# EAGLE board pc_rpi_healthypi (EAGLE 6.4)
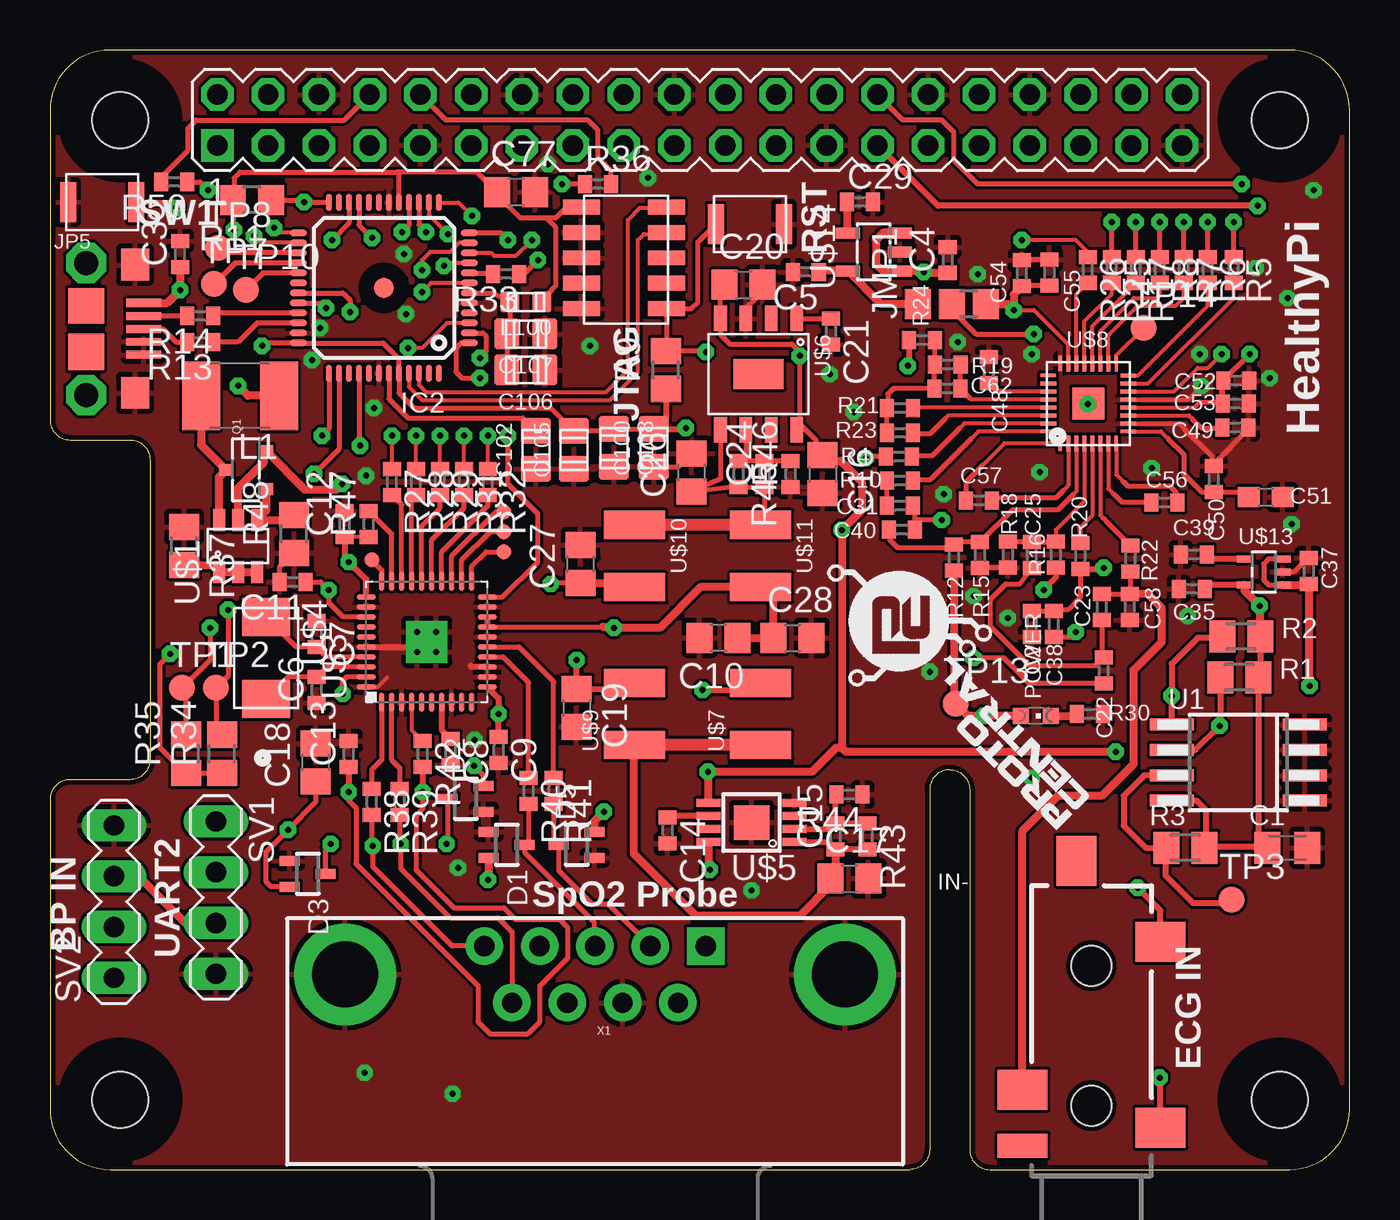
[diagram p0: board, top side]
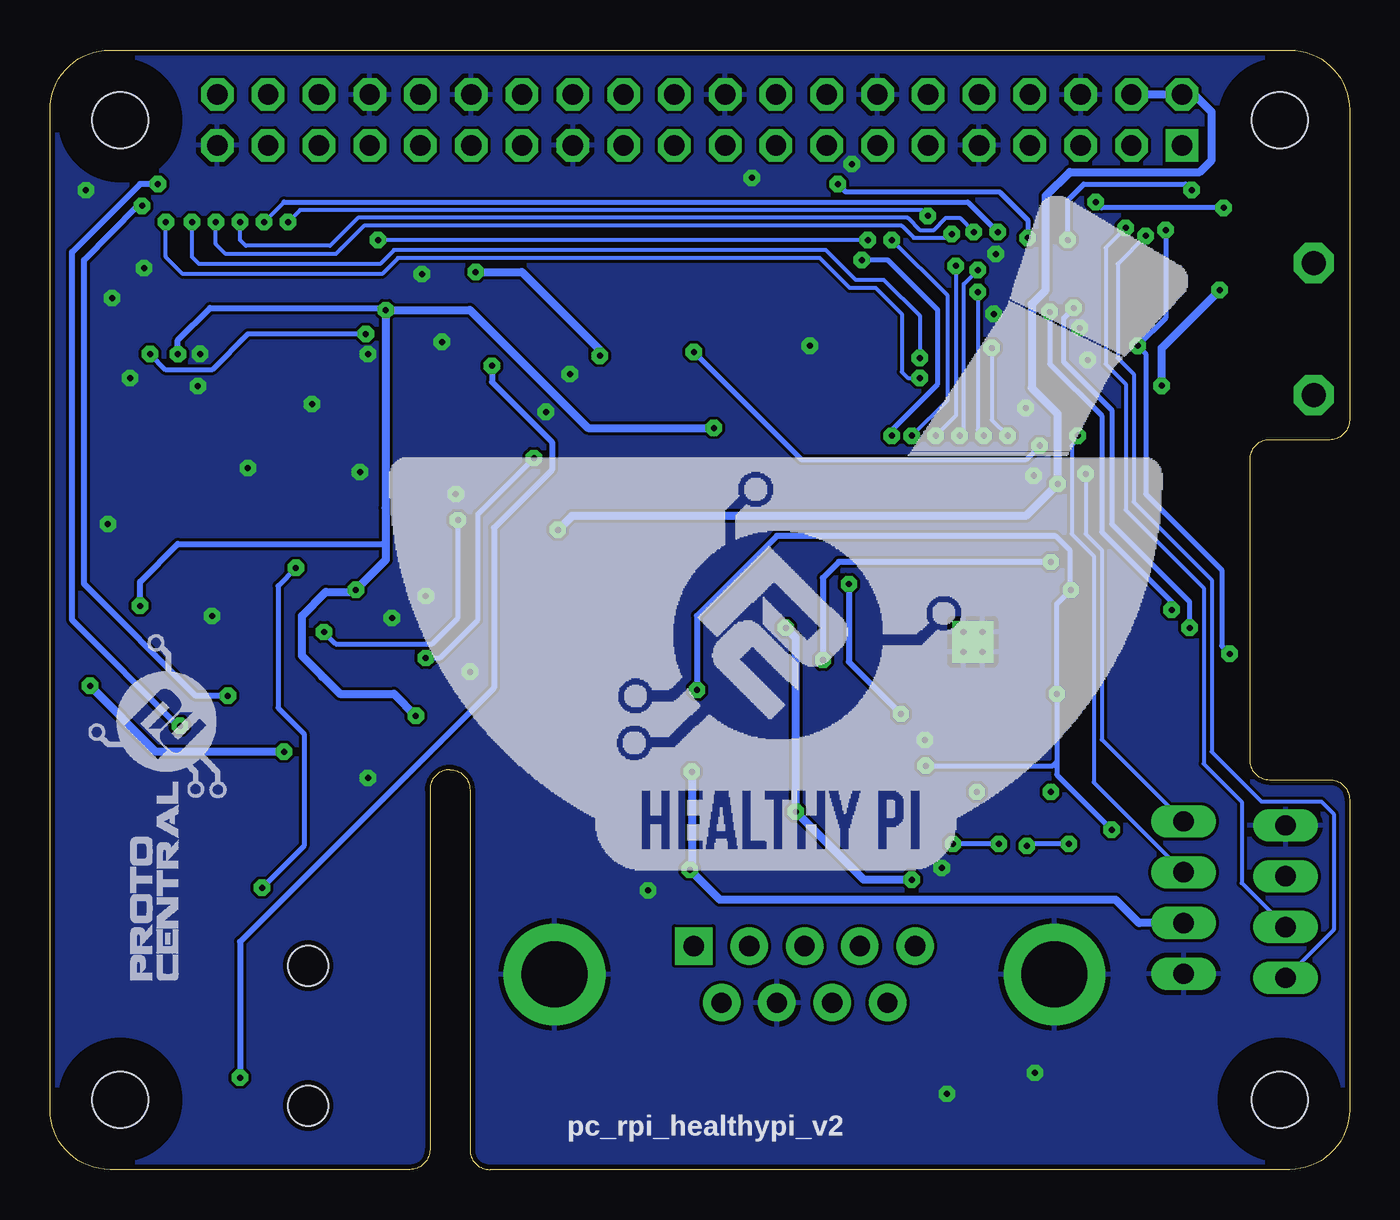
[diagram p1: board, bottom side, seen from below]

Size 65 x 56 mm. Coordinates in mm from the lower left corner, seen from the top.
Outline: 0,3 arc90 3,0 43,0 arc90 44,1 44,19 arc-90 45,20 arc-90 46,19 46,1 arc90 47,0 62,0 arc90 65,3 65,53 arc90 62,56 3,56 arc90 0,53 0,37.5 arc90 1,36.5 4,36.5 arc-90 5,35.5 5,20.5 arc-90 4,19.5 1,19.5 arc90 0,18.5 0,3
Copper layers (1*2*15*16): Top 0.035mm / dielectric 1.5mm / Route2 0.035mm / dielectric 0.15mm / Route15 0.035mm / dielectric 0.2mm / Bottom 0.035mm
Design rules "Circuitects-Rules": minimum track width 6mil, minimum drill 0.3mm, track to track 6mil, track to pad 6mil, pad to pad 6mil, via to via 6mil, smd to smd 6mil, copper to edge 10mil, drill to drill 8mil, minimum pad ring 12mil, minimum via ring 10mil, stop-mask expansion 4mil, vias tented up to drill 25mil, thermal gap 10mil
Net classes: 2 gnd: width 0.102 mm, drill 0.1 mm; 4 USBpair: width 0.102 mm, drill 0.1 mm, clearance 0.15 mm to class 3
Holes 2.8 mm at 3.5,3.5 3.5,52.5 61.5,52.5 61.5,3.5
tRestrict: area 1.9,51 to 5,54; area 60,51 to 63,54; area 60,1.9 to 63,5; area 1.9,1.9 to 5,5
bRestrict: area 1.9,1.9 to 5,5; area 1.9,51 to 5,54; area 60,1.9 to 63,5; area 60,51 to 63,54

## Footprints (pad centres in the part's own frame; a part is rotated, then mirrored left to right if it is on the bottom)
C0805K = smd 1.3 x 1.6: 1 -1,0; 2 1,0
C0402 = smd 0.7 x 0.9: 1 -0.65,0; 2 0.65,0
C0805 = smd 1.3 x 1.5: 1 -0.95,0; 2 0.95,0
C0603 = smd 1.1 x 1: 1 -0.85,0; 2 0.85,0
C0805' = smd 1.5 x 1.25: 1 0,0.95; 2 0,-0.95
HDR-SMT-50MIL/5X2 = smd 0.74 x 1.85: 1 -2.54,-2.125; 2 -2.54,2.125; 3 -1.27,-2.125; 4 -1.27,2.125; 5 0,-2.125; 6 0,2.125; 7 1.27,-2.125; 8 1.27,2.125; 9 2.54,-2.125; 10 2.54,2.125
SOT323 = smd 0.5 x 1: 1 0,0.9; 2 -0.65,-0.9; 3 0.65,-0.9
TQFP48 = smd 0.85 x 0.32: 1 -4.275,2.75; 2 -4.275,2.25; 3 -4.275,1.75; 4 -4.275,1.25; 5 -4.275,0.75; 6 -4.275,0.25; 7 -4.275,-0.25; 8 -4.275,-0.75; 9 -4.275,-1.25; 10 -4.275,-1.75; 11 -4.275,-2.25; 12 -4.275,-2.75; 25 4.275,-2.75; 26 4.275,-2.25; 27 4.275,-1.75; 28 4.275,-1.25; 29 4.275,-0.75; 30 4.275,-0.25; 31 4.275,0.25; 32 4.275,0.75; 33 4.275,1.25; 34 4.275,1.75; 35 4.275,2.25; 36 4.275,2.75 | smd 0.32 x 0.85: 13 -2.75,-4.275; 14 -2.25,-4.275; 15 -1.75,-4.275; 16 -1.25,-4.275; 17 -0.75,-4.275; 18 -0.25,-4.275; 19 0.25,-4.275; 20 0.75,-4.275; 21 1.25,-4.275; 22 1.75,-4.275; 23 2.25,-4.275; 24 2.75,-4.275; 37 2.75,4.275; 38 2.25,4.275; 39 1.75,4.275; 40 1.25,4.275; 41 0.75,4.275; 42 0.25,4.275; 43 -0.25,4.275; 44 -0.75,4.275; 45 -1.25,4.275; 46 -1.75,4.275; 47 -2.25,4.275; 48 -2.75,4.275 | smd 1 x 1: P$1 0,0
B0R-JMP = smd 1.5 x 1.3: 1 0,1.7; 2 0,0; 3 0,-1.7
AUDIO-JACK-3.5MM-SMD = smd 2 x 2.5: RING 4.3,3.45; SLEEVE 2.4,-3.45; TIP 11.7,-3.45 | smd 1.2 x 2.5: RSH 1.5,3.45 | smd 2.5 x 2: TSH 15.75,0.75 | hole 2: 3.5,0; 10.5,0
MICRO-B = smd 0.4 x 1.75: 1 -1.25,2.975; 2 -0.6,2.975; 3 0.05,2.975; 4 0.7,2.975; 5 1.35,2.975 | smd 1.8 x 1.8: P$1 -1.1,0.1; P$2 1.2,0.1 | drill 1.2 pad 2 octagon: P$3 -3.25,0.1; P$4 3.35,0.1 | smd 1.6 x 1.4: P$5 -3.15,2.55; P$6 3.25,2.55
PIN_20X2 = drill 1.016 square: 1 -24.13,-1.27 | drill 1.016 octagon: 2 -24.13,1.27; 3 -21.59,-1.27; 4 -21.59,1.27; 5 -19.05,-1.27; 6 -19.05,1.27; 7 -16.51,-1.27; 8 -16.51,1.27; 9 -13.97,-1.27; 10 -13.97,1.27; 11 -11.43,-1.27; 12 -11.43,1.27; 13 -8.89,-1.27; 14 -8.89,1.27; 15 -6.35,-1.27; 16 -6.35,1.27; 17 -3.81,-1.27; 18 -3.81,1.27; 19 -1.27,-1.27; 20 -1.27,1.27; 21 1.27,-1.27; 22 1.27,1.27; 23 3.81,-1.27; 24 3.81,1.27; 25 6.35,-1.27; 26 6.35,1.27; 27 8.89,-1.27; 28 8.89,1.27; 29 11.43,-1.27; 30 11.43,1.27; 31 13.97,-1.27; 32 13.97,1.27; 33 16.51,-1.27; 34 16.51,1.27; 35 19.05,-1.27; 36 19.05,1.27; 37 21.59,-1.27; 38 21.59,1.27; 39 24.13,-1.27; 40 24.13,1.27
L1812 = smd 1.9 x 3.4: 1 -1.95,0; 2 1.95,0
C0603' = smd 1 x 0.95: 1 0,0.8; 2 0,-0.8
CHIPLED_0603 = smd 0.8 x 0.8: A 0,-0.75; C 0,0.75
SOT23-R = smd 0.6 x 0.7: 1 -0.95,-1; 2 0.95,-1; 3 0,1
M0805 = smd 1.3 x 1.6: 1 -0.95,0; 2 0.95,0
R0402 = smd 0.7 x 0.9: 1 -0.65,0; 2 0.65,0
R0805 = smd 1.3 x 1.5: 1 -0.95,0; 2 0.95,0
MA04-1 = drill 1.016 long: 1 -3.81,0; 2 -1.27,0; 3 1.27,0; 4 3.81,0
B1,27 = smd 1.27 x 1.27: TP 0,0
PAD.03X.03 = smd 0.762 x 0.762: P$1 0,0
SOIC8 = smd 0.6 x 2.2: 1 -1.905,-3.33; 2 -0.635,-3.33; 3 0.635,-3.33; 4 1.905,-3.33; 5 1.905,3.33; 6 0.635,3.33; 7 -0.635,3.33; 8 -1.905,3.33
SOT26 = smd 0.6 x 1.1: 1 -0.95,-1.3; 2 0,-1.3; 3 0.95,-1.3; 4 0.95,1.3; 5 0,1.3; 6 -0.95,1.3
QFN-40 = smd 0.95 x 0.28: 1 -3.025,2.25; 2 -3.025,1.75; 3 -3.025,1.25; 4 -3.025,0.75; 5 -3.025,0.25; 6 -3.025,-0.25; 7 -3.025,-0.75; 8 -3.025,-1.25; 9 -3.025,-1.75; 10 -3.025,-2.25; 21 3.025,-2.25; 22 3.025,-1.75; 23 3.025,-1.25; 24 3.025,-0.75; 25 3.025,-0.25; 26 3.025,0.25; 27 3.025,0.75; 28 3.025,1.25; 29 3.025,1.75; 30 3.025,2.25 | smd 0.28 x 0.95: 11 -2.25,-3.025; 12 -1.75,-3.025; 13 -1.25,-3.025; 14 -0.75,-3.025; 15 -0.25,-3.025; 16 0.25,-3.025; 17 0.75,-3.025; 18 1.25,-3.025; 19 1.75,-3.025; 20 2.25,-3.025; 31 2.25,3.025; 32 1.75,3.025; 33 1.25,3.025; 34 0.75,3.025; 35 0.25,3.025; 36 -0.25,3.025; 37 -0.75,3.025; 38 -1.25,3.025; 39 -1.75,3.025; 40 -2.25,3.025 | drill 0.3 pad 1.1 square: EXP@6 -0.5,0.475; EXP@7 0.5,0.475; EXP@10 -0.5,-0.475; EXP@11 0.5,-0.475
ABM3 = smd 1.9 x 2.4: 1 -2.05,0; 2 2.05,0
S-PDSO-G08 = smd 0.4 x 1.2: 1 -0.975,-2.157; 2 -0.325,-2.157; 3 0.325,-2.157; 4 0.975,-2.157; 5 0.975,2.157; 6 0.325,2.157; 7 -0.325,2.157; 8 -0.975,2.157 | smd 1.73 x 1.78: TH 0,0
DDA = smd 0.635 x 1.27: 1 -1.905,-2.78; 2 -0.635,-2.78; 3 0.635,-2.78; 4 1.905,-2.78; 5 1.905,2.78; 6 0.635,2.78; 7 -0.636,2.78; 8 -1.905,2.78 | smd 2.5 x 1.5: 9 0,0
LPS = smd 1.4 x 3.05: 1 -1.56,0; 2 1.56,0
S-PVQFN-N32 = smd 0.8 x 0.2: 1 -2,1.4; 2 -2,1; 3 -2,0.6; 4 -2,0.2; 5 -2,-0.2; 6 -2,-0.6; 7 -2,-1; 8 -2,-1.4; 17 2,-1.4; 18 2,-1; 19 2,-0.6; 20 2,-0.2; 21 2,0.2; 22 2,0.6; 23 2,1; 24 2,1.4 | smd 0.2 x 0.8: 9 -1.4,-2; 10 -1,-2; 11 -0.6,-2; 12 -0.2,-2; 13 0.2,-2; 14 0.6,-2; 15 1,-2; 16 1.4,-2; 25 1.4,2; 26 1,2; 27 0.6,2; 28 0.2,2; 29 -0.2,2; 30 -0.6,2; 31 -1,2; 32 -1.4,2 | smd 1.6 x 1.6: P$33 0,0
SC70-5 = smd 0.35 x 0.8: 1 -0.65,-0.95; 2 0,-0.95; 3 0.65,-0.95; 4 0.65,0.95; 5 -0.65,0.95
SOT23-DBV = smd 0.55 x 1.2: 1 -0.95,-1.3; 2 0,-1.3; 3 0.95,-1.3; 4 0.95,1.3; 5 -0.95,1.3
B3U-1000P = smd 0.8 x 2: P$1 -1.7,0; P$2 1.7,0
DB9 = drill 1.016 pad 1.88 square: 1 -5.54,-1.42 | drill 1.016 pad 1.88: 2 -2.77,-1.42; 3 0,-1.42; 4 2.77,-1.42; 5 5.54,-1.42; 6 -4.15,1.42; 7 -1.38,1.42; 8 1.38,1.42; 9 4.15,1.42 | drill 3.302 pad 5.08: G1 -12.5,0; G2 12.5,0

## Placement (x,y rotation side)
C1  100nF  [C0805K]  61.88,16.1 0 top
C2  [C0402]  49.1,27.29 270 top
C3  100nf  [C0402]  6.5,45.8 90 top
C4  1u  [C0402]  44.9,45.5 90 top
C5  1u  [C0402]  37.8,44.9 180 top
C6  22p  [C0402]  13.34,23.99 90 top
C7  22p  [C0402]  13.34,26.79 270 top
C8  2.2u  [C0402]  20.04,20.89 270 top
C9  0.1u  [C0402]  22.44,20.99 270 top
C10  1u  [C0805]  33.44,26.59 180 top
C11  0.1u  [C0402]  12.14,29.39 180 top
C12  0.1u  [C0402]  14.74,32.29 90 top
C13  2.2u  [C0402]  14.94,20.79 90 top
C14  100nF  [C0402]  30.89,16.96 270 top
C15  100nF  [C0402]  39.29,16.66 90 top
C16  10uF  [C0805]  38.64,34.79 270 top
C17  10uF  [C0805]  39.99,14.56 0 top
C18  10uF  [C0805]  13.29,20.36 90 top
C19  10uF  [C0805]  26.34,23.09 270 top
C20  10uF  [C0805]  34.69,44.26 0 top
C21  100nF  [C0402]  39.06,41.91 270 top
C22  2.2n  [C0402]  52.7,24.96 270 top
C23  100n  [C0402]  52.6,28.13 270 top
C24  1000pF  [C0402]  35.74,34.79 90 top
C25  2.2n  [C0402]  49.1,30.74 90 top
C26  10uF  [C0805]  32.09,34.86 90 top
C27  10uF  [C0805]  26.54,30.29 90 top
C28  10uF  [C0805]  37.14,26.59 0 top
C29  1u  [C0402]  40.5,48.4 0 top
C31  2.2n  [C0402]  42.52,33.21 180 top
C35  1u  [C0402]  57.1,29.05 0 top
C37  1u  [C0402]  62.96,29.93 270 top
C38  100n  [C0402]  50.2,27.28 270 top
C39  10n  [C0402]  57.2,30.77 0 top
C40  2.2n  [C0402]  42.6,32.01 180 top
C48  1u, NP0/C0G  [C0402]  46.96,39.98 270 top
C49  1u, NP0/C0G  [C0402]  59.28,37.12 180 top
C50  100n  [C0402]  58.2,34.53 270 top
C51  10u  [C0603]  60.81,33.63 0 top
C52  100n  [C0402]  59.33,39.47 180 top
C53  1u  [C0402]  59.3,38.31 180 top
C54  100n  [C0402]  48.6,44.83 270 top
C55  1u  [C0402]  49.98,44.87 270 top
C56  47n  [C0402]  55.74,33.37 0 top
C57  47n  [C0402]  46.46,33.47 0 top
C58  DNP  [C0402]  54,28.15 90 top
C62  47p  [C0402]  44.88,39.07 0 top
C77  100n  [C0805]  23.3,48.9 0 top
C100  100nF  [C0805']  30.2,36.1 0 top
C102  100nF  [C0805']  24.3,36 0 top
C105  100nF  [C0805']  26.2,36 0 top
C106  100nF  [C0805']  23.8,40 90 top
C107  10uF  [C0805']  23.8,41.8 90 top
C108  100nF  [C0805']  28.2,36.1 180 top
CON_JTAG1  HDR-SMT-50MIL/5X2  [HDR-SMT-50MIL/5X2]  28.7,45.6 270 top
D1  [SOT323]  22.84,16.24 270 top
D2  [SOT323]  20.79,18.54 90 top
D3  [SOT323]  12.89,14.79 270 top
D5  [SOT323]  26.34,16.24 90 top
IC2  SAMD21G18A-AUT  [TQFP48]  16.7,44.1 180 top
JMP1  0R-JUMPB  [B0R-JMP]  45.1,43.3 90 top
JP3  [AUDIO-JACK-3.5MM-SMD]  52.09,-0.3 90 top
JP5  MICRO-B  [MICRO-B]  1.7,42.1 270 top
K1  PIN20X2  [PIN_20X2]  32.5,52.5 0 top
L1  MF-MSMF050-2  [L1812]  9.5,38.7 180 top
L100  BLM18PG471SN1  [C0603']  23.8,43.4 90 top
POWER  Red  [CHIPLED_0603]  49.31,22.7 270 top
Q1  SI2323DS-TI-GE3  [SOT23-R]  9.8,35 90 top
R1  3k9  [M0805]  59.48,24.62 0 top
R2  3k9  [M0805]  59.58,26.66 0 top
R3  1k  [M0805]  56.8,16.1 0 top
R4  40.2k  [R0402]  42.47,35.66 0 top
R5  0R  [R0402]  59.2,45 270 top
R6  0R  [R0402]  57.9,45 270 top
R7  0R  [R0402]  56.7,45 270 top
R8  0R  [R0402]  55.5,45 270 top
R9  10K  [R0805]  30.8,40 90 top
R10  40.2k  [R0402]  42.52,34.46 0 top
R11  100K  [R0805]  10.1,48.5 180 top
R12  10M  [R0402]  45.22,30.61 90 top
R13  0R  [R0402]  7.5,41.4 180 top
R14  0R  [R0402]  7.5,42.7 180 top
R15  10M  [R0402]  46.52,30.73 90 top
R16  10M  [R0402]  50.31,30.76 90 top
R17  0R  [R0402]  54.3,45 270 top
R18  10M  [R0402]  47.92,30.77 90 top
R19  1M  [R0402]  44.9,40.27 0 top
R20  0R  [R0402]  51.53,30.7 90 top
R21  100K  [R0402]  42.51,38.09 0 top
R22  0R  [R0402]  54.04,30.57 90 top
R23  0R  [R0402]  42.5,36.85 0 top
R24  100k  [R0402]  43.61,41.49 0 top
R25  0R  [R0402]  53.1,45 270 top
R26  0R  [R0402]  51.9,45 270 top
R27  0R  [R0402]  17.1,34.4 270 top
R28  0R  [R0402]  18.3,34.4 270 top
R29  0R  [R0402]  19.5,34.4 270 top
R30  330R  [R0402]  52,22.79 180 top
R31  0R  [R0402]  20.7,34.4 270 top
R32  0R  [R0402]  21.9,34.4 270 top
R33  0R  [R0402]  22.8,44.8 180 top
R34  10K  [R0805]  8.6,20.8 90 top
R35  10K  [R0805]  6.8,20.8 90 top
R36  100K  [R0402]  27.4,49.3 0 top
R37  10K  [R0805]  6.7,31.2 270 top
R38  0R  [R0402]  16.09,18.39 270 top
R39  0R  [R0402]  17.49,18.39 270 top
R40  0R  [R0402]  23.94,18.94 270 top
R41  0R  [R0402]  25.19,18.94 270 top
R42  0R  [R0402]  18.64,20.79 270 top
R43  75K  [R0402]  40.89,16.66 270 top
R44  47K  [R0402]  39.99,18.76 180 top
R45  4.02k  [R0402]  34.44,34.79 270 top
R46  1k  [R0402]  37.04,34.79 90 top
R47  10K  [R0402]  15.94,32.29 90 top
R48  47K  [R0805]  12.2,31.8 90 top
R50  100K  [R0402]  6.2,49.4 180 top
SV1  [MA04-1]  8.3,13.6 270 top
SV2  [MA04-1]  3.2,13.4 90 top
TP1  TPSQB1,27  [B1,27]  6.6,24.1 0 top
TP2  TPSQB1,27  [B1,27]  8.3,24.1 0 top
TP3  TPSQB1,27  [B1,27]  59.1,13.5 0 top
TP4  TEST-POINT3  [PAD.03X.03]  16.09,30.49 90 top
TP7  TPSQB1,27  [B1,27]  8.2,44.3 0 top
TP8  TPSQB1,27  [B1,27]  8.4,46.1 0 top
TP9  TEST-POINT3  [PAD.03X.03]  22.7,32.9 0 top
TP10  TPSQB1,27  [B1,27]  9.8,44 0 top
TP11  TEST-POINT3  [PAD.03X.03]  22.7,31.9 0 top
TP12  TEST-POINT3  [PAD.03X.03]  22.7,30.9 0 top
TP13  TPSQB1,27  [B1,27]  45.3,23.3 0 top
TP14  TPSQB1,27  [B1,27]  54.7,42.1 0 top
U1  EEPROM24  [SOIC8]  59.44,20.36 90 top
U$1  DMMT5401  [SOT26]  9.4,31.2 0 top
U$2  [PROTY_WITH_TEXT]  56.14,8.36 90 bottom
U$3  AFE4400  [QFN-40]  18.84,26.39 90 top
U$4  ABM3  [ABM3]  10.8,25.6 270 top
U$5  TPS7A4901  [S-PDSO-G08]  35.09,17.36 90 top
U$6  LP3878  [DDA]  35.44,39.79 180 top
U$7  LPS  [LPS]  35.54,22.79 90 top
U$8  [S-PVQFN-N32]  51.93,38.32 90 top
U$9  LPS  [LPS]  29.24,22.79 90 top
U$10  LPS  [LPS]  29.24,30.69 270 top
U$11  LPS  [LPS]  35.54,30.69 270 top
U$12  [PROTY_WITH_TEXT]  54.54,19.64 135 top
U$13  TPS717XX  [SC70-5]  60.71,29.89 90 top
U$14  TPS730XX  [SOT23-DBV]  41.2,45.9 90 top
U$15  HEALTHYPI  [HEALTHYPI]  48,15 0 bottom
U$17  B3U-1000P  [B3U-1000P]  2.6,48.4 0 top
U$18  B3U-1000P  [B3U-1000P]  35,47.3 0 top
X1  [DB9]  27.26,9.76 180 top

## Library data of the parts
C1 = resistor; DIELECTRIC: X7R
C2-C29 C31 C35 C37-C40 C48-C50 C52-C58 C62 C77 L1 R4-R48 R50 = rcl
C51 = resistor
C100 C102 C105-C108 IC2 L100 = Arduino
CON_JTAG1 JP5 U$1-U$15 U$17 U$18 X1 = circuitects
D1-D3 D5 = zetex; OC_FARNELL: unknown; OC_NEWARK: unknown
JMP1 = jump-0r-smd
JP3 = SparkFun-Connectors; PROD_ID: CONN-10353
K1 U1 = FLYFISH
POWER = led
Q1 = microbuilder
R1-R3 = resistor; TOLERANCE: 5%
SV1 SV2 = con-lstb; OC_FARNELL: unknown; OC_NEWARK: unknown
TP1-TP3 TP7 TP8 TP10 TP13 TP14 = testpad
TP4 TP9 TP11 TP12 = SparkFun

## Nets
!ADC_RESET: R47.2 U$3.29
+3V3: C1.1 C35.2 C54.2 C55.2 C77.1 C100.1 C105.1 C108.2 CON_JTAG1.1 IC2.17 IC2.36 IC2.44 JMP1.3 L100.2 POWER.A R1.2 R2.2 R3.2 R9.1 R11.2 R12.1 R16.1 R34.1 R35.1 TP13.TP U1.8 U$8.14 U$8.23 U$13.5
+5V: C4.1 C16.1 C20.1 C37.2 K1.2 K1.4 Q1.2 SV1.3 SV2.3 U$1.5 U$5.5 U$5.8 U$6.4 U$6.8 U$13.1 U$13.3 U$14.1 U$14.3
BP_RX: IC2.37 SV1.2
BP_TX: IC2.38 SV1.1
CLK: TP14.TP U$8.17
DIAG_END: TP12.P$1 U$3.21
ECG_!DRDY: IC2.10 R26.1
ECG_CS: IC2.14 R7.1
ECG_MISO: IC2.13 R25.1
ECG_MOSI: IC2.15 R8.1
ECG_PWDN: IC2.1 R5.1
ECG_SCK: IC2.16 R17.1
ECG_START: IC2.2 R6.1
GLUCO_RX: IC2.25 SV2.2
GLUCO_TX: IC2.26 SV2.1
GND: C1.2 C2.2 C3.2 C4.2 C5.2 C6.1 C7.1 C8.2 C9.2 C10.2 C11.2 C12.2 C13.2 C14.2 C16.2 C17.2 C18.2 C19.2 C20.2 C21.2 C26.2 C27.2 C28.2 C29.2 C35.1 C37.1 C39.1 C48.1 C49.1 C50.1 C51.2 C52.1 C53.1 C54.1 C55.1 C58.1 C77.2 C100.2 C102.2 C105.2 C106.2 C107.2 C108.1 CON_JTAG1.3 CON_JTAG1.5 CON_JTAG1.9 D1.2 D2.2 D3.2 D5.2 IC2.5 IC2.18 IC2.35 IC2.42 JP5.4 JP5.5 JP5.P$5 JP5.P$6 K1.6 K1.9 K1.14 K1.20 K1.25 K1.30 K1.34 K1.39 R15.1 R18.1 R30.1 R37.1 R44.1 R46.1 R48.1 SV1.4 SV2.4 U1.1 U1.2 U1.3 U1.4 U$3.3 U$3.8 U$3.12 U$3.13 U$3.16 U$3.19 U$3.32 U$3.36 U$3.40 U$3.EXP@6 U$3.EXP@7 U$3.EXP@10 U$3.EXP@11 U$5.4 U$5.TH U$6.3 U$8.10 U$8.13 U$8.24 U$13.2 U$14.2 U$17.P$1 U$18.P$2 X1.7 X1.G1 X1.G2
INN: D3.1 R38.2 X1.5
INP: D2.1 R39.2 X1.9
LED_ALM: TP11.P$1 U$3.22
LED_DRV_SUP: C10.1 C28.1 D1.3 D5.3 U$3.17 U$3.18 U$11.2
N$1: K1.28 R1.1 U1.6
N$2: K1.27 R2.1 U1.5
N$3: R3.1 TP3.TP U1.7
N$4: C39.2 U$13.4
N$5: C52.2 C53.2 JMP1.2 U$8.12
N$6: C106.1 C107.1 IC2.6 L100.1
N$7: POWER.C R30.2
N$8: R4.2 U$8.31
N$9: C6.2 U$3.38 U$4.2
N$10: C22.2 R4.1
N$11: C22.1 C23.2 C25.1
N$12: R22.2 U$8.6
N$13: C7.2 U$3.37 U$4.1
N$14: R20.2 U$8.5
N$15: C8.1 U$3.7
N$16: TP4.P$1 U$3.30
N$17: R38.1 U$3.1
N$18: R39.1 U$3.2
N$19: C48.2 U$8.27
N$20: R40.1 U$3.14
N$21: R41.1 U$3.15
N$23: C13.1 R42.2
N$25: C14.1 U$5.6
N$26: R10.2 U$8.32
N$27: C15.1 C17.1 R43.2 U$5.1 U$7.1 U$9.1
N$28: C31.2 R10.1
N$29: C31.1 C38.2 C40.1
N$30: C2.1 C38.1 JP3.TIP R20.1
N$31: C40.2 R12.2 R15.2 U$8.3
N$32: C25.2 R16.2 R18.2 U$8.4
N$33: R21.2 U$8.29
N$34: C62.2 R19.2 U$8.28
N$35: C62.1 R19.1 R21.1 R23.1 R24.2
N$36: C49.2 U$8.11
N$37: C56.2 U$8.8
N$38: C56.1 U$8.7
N$39: C15.2 R43.1 R44.2 U$5.2
N$40: C50.2 C51.1 U$8.9
N$41: C57.2 U$8.2
N$42: C21.1 U$6.1
N$43: C57.1 U$8.1
N$44: C24.1 C26.1 R45.2 U$6.5 U$10.1 U$11.1
N$45: C23.1 C58.2 JP3.RING R22.1
N$46: C24.2 R45.1 R46.2 U$6.6
N$50: R23.2 U$8.30
N$51: JP3.SLEEVE R24.1
N$52: R5.2 U$8.15
N$53: IC2.21 R36.1
N$54: IC2.22 R50.1
N$55: R6.2 U$8.16
N$56: R7.2 U$8.18
N$57: IC2.24 R11.1 U$17.P$2
N$58: R8.2 U$8.19
N$59: R17.2 U$8.20
N$60: R25.2 U$8.21
N$61: R26.2 U$8.22
N$62: R33.1 U$3.20
N$63: R27.2 U$3.28
N$64: R28.2 U$3.27
N$65: R29.2 U$3.26
N$66: R31.2 U$3.25
N$67: IC2.27 TP8.TP
N$68: IC2.28 TP7.TP
N$69: IC2.29 TP10.TP
N$70: R32.2 U$3.24
N$71: C29.1 U$14.4
N$72: R37.2 U$1.1 U$1.2 U$1.3
N$73: Q1.1 R48.2 U$1.4
N$80: L1.2 Q1.3 U$1.6
PD_ALM: TP9.P$1 U$3.23
RPI_RXD: K1.10 R36.2
RPI_TXD: K1.8 R50.2
RX_ANA_SUP: C11.1 C18.1 D2.3 D3.3 U$3.33 U$3.39 U$7.2
RX_DIG_SUP: C12.1 C19.1 R47.1 U$3.31 U$9.2
SAM_RESETN: CON_JTAG1.10 IC2.40 R9.2 U$18.P$1
SAM_SWDCLK: CON_JTAG1.4 IC2.45
SAM_SWDIO: CON_JTAG1.2 IC2.46
SCL: IC2.32 R35.2 TP1.TP
SDA: IC2.31 R34.2 TP2.TP
SPO2_CS: IC2.7 R28.1
SPO2_DRDY: IC2.3 R27.1
SPO2_MISO: IC2.9 R31.1
SPO2_MOSI: IC2.11 R29.1
SPO2_SCK: IC2.12 R32.1
SPO2_START: IC2.8 R33.2
TARGET_USB_N [USBpair]: IC2.33 R14.1
TARGET_USB_P [USBpair]: IC2.34 R13.1
TX_CTRL_SUP: C9.1 C27.1 U$3.11 U$10.2
TXN: D1.1 R40.2 X1.3
TXP: D5.1 R41.2 X1.2
USB_N [USBpair]: JP5.2 R14.2
USB_P [USBpair]: JP5.3 R13.2
VCC: C5.1 JMP1.1 U$14.5
VCCIO: C3.1 JP5.1 L1.1
VCM: R42.1 U$3.4
VDDCORE: C102.1 IC2.43

## Tracks (layer width: path | path; a pad name or v marks a point on that pad's centre or on a via)
!ADC_RESET
  Top 0.254: U$3.29 17.09,31.79 R47.2
+3V3  (via drill 0.3)
  Top 0.2: U$8.23 50.93,41.27 49.21,42.99 v48.2,42.99 | L100.2 24.7,43 24.9,43.2 | 24.9,47.5 24.8,47.6 | U$8.14 56.22,38.92 57.4,40.1 57.91,40.1 v58.6,40.79
  Top 0.254: C55.2 48.64,44.22 C54.2 | IC2.17 17.45,49.85 17.4,49.9 | CON_JTAG1.1 26.54,48.1 25.8,48.1 25.3,47.6 24.8,47.6 23.5,47.6 22.35,48.75 C77.1 21.35,49.9 17.4,49.9 | C100.1 C108.2 28.1,36.95 C105.1 25.05,38.1 18.2,38.1 17.45,38.85 IC2.44 17.45,40.55 16.65,41.35 IC2.36 10.75,41.35 v10.6,41.2 | v9.2,47 9.15,47.05 R11.2 9.2,48.45 9.2,49.6 9.5,49.9 17.4,49.9 | 24.9,43.2 24.9,43.8 25.3,44.2 25.3,47.1 24.9,47.5 | R34.1 R35.1 6.25,20.35 5.5,21.1 5.5,25.3 v6,25.8
  Top 0.305: C54.2 | R2.2 60.52,24.72 R1.2 60.42,16.28 60.3,16.15 | U1.8 57.34,18.45 57.8,18 57.8,16.15 | 57.8,16.15 R3.2 | 57.8,16.15 60.3,16.15 | 60.3,16.15 60.82,16.15 C1.1 | v31.8,37.1 31.75,37.05 C100.1 30.8,37.65 R9.1 | U$13.5 57.94,29.24 C35.2 | R16.1 50.31,29.61 v49.7,29
  Top 0.406: C54.2 48.2,43.78 v48.2,42.99 47.89,43.3 JMP1.3 | R2.2 60.52,28.18 v60.5,28.2 59.76,28.94 U$13.5 | R12.1 45.22,23.38 TP13.TP 45.9,22.7 v46.7,22.7 POWER.A
  Bottom 0.254: 48.3,33.09 48.2,33.19 | v9.2,47 9.2,42.6 v10.6,41.2 10.2,40.8 10.2,33.8 6.4,30 6.4,26.2 v6,25.8
  Bottom 0.305: v58.6,40.79 58.6,41.5 57,43.1 48.31,43.1 v48.2,42.99 | v60.5,28.2 60.5,29.4 58.6,31.3 48.3,31.3 48.2,31.2
  Bottom 0.406: v46.7,22.7 47.8,23.8 50.5,23.8 51.35,24.65 51.4,24.65 51.4,24.7 52.4,25.7 52.4,27.7 51.2,28.9 49.8,28.9 v49.7,29 48.2,30.5 48.2,31.2 48.2,33.19 v48.2,42.99 43.99,42.99 38.1,37.1 v31.8,37.1
+5V  (via drill 0.3)
  Top 0.254: U$13.3 60.94,30.54 60.7,30.3 60.7,29.5 60.96,29.24 U$13.1 | C20.1 33.53,43.76 U$6.4 33.53,41.77 34,41.3 37.1,41.3 37.5,40.9 v37.5,40.7 37.5,37.3 37.79,37.01 | U$6.8 37.79,37.01 | 37.79,37.01 38.3,36.5 38.3,35.48 C16.1
  Top 0.406: C16.1 38.86,35.44 39.56,35.44 40.6,34.4 40.6,33 v39.6,32 39.6,21.1 | U$5.5 32.93,19.87 v32.9,19.9 38.1,19.9 39.3,21.1 39.6,21.1 | U$5.8 32.93,15.07 v33,15 | U$13.1 62.92,29.24 C37.2 62.96,24.24 v63,24.2 | v53.3,20.9 39.8,20.9 39.6,21.1 | SV2.3 4.43,14.67 6.77,12.33 SV1.3 | U$1.5 9.4,34.1 10.7,35.4 10.7,35.85 Q1.2 12.75,34 14.3,34 v14.6,34.3 | U$14.3 41.65,46.85 41.3,46.5 41.3,45.3 41.65,44.95 U$14.1 43.65,44.95 v43.7,44.9 43.75,44.85 C4.1
  Bottom 0.406: v32.9,19.9 32.9,15.1 v33,15 31.5,13.5 11.7,13.5 10.53,12.33 SV1.3 | v53.3,20.9 59.7,20.9 v63,24.2 | K1.4 K1.2 7.77,53.77 6.9,52.9 6.9,50.5 7.5,49.9 14,49.9 15.2,48.7 15.2,44 15.9,43.3 15.9,39.1 14.6,37.8 v14.6,34.3 16.2,32.7 38.9,32.7 v39.6,32 | v43.7,44.9 41.4,44.9 37.5,41 v37.5,40.7
BP_RX  (via drill 0.3)
  Top 0.254: IC2.37 13.95,37.05 v13.6,36.7
  Bottom 0.2: v13.6,36.7 13.6,36.5 13.9,36.2 13.9,31.8 12.8,30.7 12.8,19.37 SV1.2
BP_TX  (via drill 0.3)
  Top 0.254: IC2.38 14.45,36.05 v13.2,34.8
  Bottom 0.2: v13.2,34.8 13.2,31.8 12.4,31 12.4,21.51 SV1.1
CLK
  Top 0.2: U$8.17 53.33,40.73 TP14.TP
DIAG_END
  Top 0.254: U$3.21 21.09,30.19 21.8,30.9 TP12.P$1
ECG_!DRDY  (via drill 0.3)
  Top 0.2: R26.1 51.9,45.9 51.3,46.5 v48.6,46.5 | IC2.10 22.05,45.85 22.2,45.7 23.3,45.7 v24.1,46.5
  Bottom 0.2: v24.1,46.5 v48.6,46.5
ECG_CS  (via drill 0.3)
  Top 0.2: IC2.14 18.95,47.75 v19.9,46.8
  Top 0.254: R7.1 v56.7,47.4
  Bottom 0.2: v56.7,47.4 56.7,46.3 56.2,45.8 50.7,45.8 49.3,47.2 22.4,47.2 21.8,46.6 20.1,46.6 v19.9,46.8
ECG_MISO  (via drill 0.3)
  Top 0.2: IC2.13 20.43,48.38 v21.1,47.7
  Top 0.254: R25.1 v53.1,47.4
  Bottom 0.2: v21.1,47.7 21.4,48 52.5,48 v53.1,47.4
ECG_MOSI  (via drill 0.3)
  Top 0.254: R8.1 v55.5,47.4 | IC2.15 18.45,47.25 v18.8,46.9
  Bottom 0.2: v55.5,47.4 55.5,46.5 55.2,46.2 51,46.2 49.6,47.6 22.1,47.6 21.5,47 20.8,47 20.2,47.6 19.5,47.6 v18.8,46.9
ECG_PWDN  (via drill 0.3)
  Top 0.254: R5.1 v59.2,47.4 | IC2.1 20.55,41.35 20.3,41.1 20.3,39.9 20.6,39.6 v21.5,39.6
  Bottom 0.2: v21.5,39.6 22.1,39.6 22.4,39.9 22.4,42.8 23.7,44.1 25,44.1 26.5,45.6 47.6,45.6 48.4,44.8 58.35,44.8 R5.1 v59.2,47.4
ECG_SCK  (via drill 0.3)
  Top 0.254: R17.1 v54.3,47.4 | IC2.16 17.95,47.25 v17.6,46.9
  Bottom 0.2: 53.3,48.4 v54.3,47.4
  Bottom 0.254: 53.3,48.4 19.1,48.4 v17.6,46.9
ECG_START  (via drill 0.3)
  Top 0.254: R6.1 v57.9,47.4 | IC2.2 21.65,41.85 21.8,41.7 21.8,40.9 v21.5,40.6
  Bottom 0.2: v21.5,40.6 21.5,42.7 23.3,44.5 24.7,44.5 26.2,46 47.8,46 48.5,45.3 57.55,45.3 R6.1 v57.9,47.4
GLUCO_RX  (via drill 0.3)
  Top 0.2: IC2.25 11.45,46.85 v11.2,47.1
  Bottom 0.2: v11.2,47.1 12.2,46.1 12.2,40.3 11.2,39.3 11.2,33 7.3,29.1 7.3,20.3 5.4,18.4 5.4,14.33 SV2.2
GLUCO_TX  (via drill 0.3)
  Top 0.2: IC2.26 10.55,46.35 v10.2,46.7
  Bottom 0.2: v10.2,46.7 11.6,45.3 11.6,40.6 10.8,39.8 10.8,33.4 6.9,29.5 6.9,20.9 6.55,20.55 4.4,18.4 1.4,18.4 0.8,17.8 0.8,11.99 SV2.1
GND  (via drill 0.3)
  Top 0.2: U$8.10 56.47,37.32 56.72,37.07 | U$8.13 56.93,38.52 v57.6,39.19 | U$3.40 16.39,24.14 16.84,24.59
  Top 0.254: R18.1 46.56,30.12 R15.1 | 56.72,37.07 58.1,35.69 58.1,35.28 C50.1 58.2,35.3 59.93,37.03 C49.1 | C37.1 62.89,30.58 62.21,29.9 U$13.2 | C55.1 48.64,45.52 C54.1 | U$6.3 34.8,43.1 35.3,43.6 35.3,44.22 C20.2 | C100.2 31.43,35.15 C26.2 | C11.2 11.49,30.14 R48.1
  Top 0.305: U$3.36 18.11,26.14 U$3.EXP@6 | U$3.13 21.09,25.14 21.04,25.19
  Bottom 0.305: U$3.EXP@10 U$3.EXP@11 U$3.EXP@7 U$3.EXP@6
  other vias: 60.3,45.09 56.9,27.69 20.4,15.09 49.1,40.79 63.2,48.99 47.9,27.59 46.2,28.69 39,39.79 44.7,33.79 55.1,35.09 61.9,43.59 49.1,19.59 51.9,38.29 49.5,34.89 61,39.59 62.1,32.29 46.4,44.79 35.09,13.96 21.24,21.49 20.14,3.79 15.74,4.84 13.1,40.5 17.8,42.8 13.5,42.1 27,41.2 16.2,38.1 15.8,34.7 57.5,40.8 40.2,37.9 45.4,41.4 44,24.9 17.7,45.8 29.9,49.6 24.9,50.3
  pour Bottom: 0,3 arc90 3,0 43,0 arc90 44,1 44,19 arc-90 45,20 arc-90 46,19 46,1 arc90 47,0 62,0 arc90 65,3 65,53 arc90 62,56 3,56 arc90 0,53 0,37.5 arc90 1,36.5 4,36.5 arc-90 5,35.5 5,20.5 arc-90 4,19.5 1,19.5 arc90 0,18.5
  pour Top: 0,3 arc90 3,0 43,0 arc90 44,1 44,19 arc-90 45,20 arc-90 46,19 46,1 arc90 47,0 62,0 arc90 65,3 65,53 arc90 62,56 3,56 arc90 0,53 0,37.5 arc90 1,36.5 4,36.5 arc-90 5,35.5 5,20.5 arc-90 4,19.5 1,19.5 arc90 0,18.5
INN  (via drill 0.3)
  Top 0.254: R38.2 16.09,16.24 v16.14,16.19 16.14,15.16 20.12,11.18 X1.5 | D3.1 13.79,16.04 v14.04,16.29
  Bottom 0.254: v14.04,16.29 16.04,16.29 v16.14,16.19
INP  (via drill 0.3)
  Top 0.254: R39.2 17.49,16.34 v17.54,16.29 17.54,15.06 20,12.6 22.4,12.6 23.1,11.9 X1.9 | D2.1 19.89,16.34 v19.84,16.29
  Bottom 0.254: v17.54,16.29 v19.84,16.29
LED_ALM
  Top 0.254: U$3.22 20.59,30.49 22,31.9 TP11.P$1
LED_DRV_SUP  (via drill 0.3)
  Top 0.254: U$3.17 27.66,27.14
  Top 0.305: U$3.18 U$3.17
  Top 0.406: C10.1 C28.1 36.19,28.48 U$11.2 32.53,29.13 30.5,27.1 v28.2,27.1 28.16,27.14 27.66,27.14 | D1.3 21.94,14.54 v21.9,14.5 | D5.3 27.24,17.44 v27.7,17.9
  Bottom 0.406: v21.9,14.5 24.3,14.5 v27.7,17.9 27.7,26.6 v28.2,27.1
N$1  (via drill 0.3)
  Top 0.254: v59.6,49.3 46.4,49.3 45.2,50.5 45.2,51.9 44.6,52.5 42.66,52.5 K1.28
  Top 0.305: U1.6 57.3,21 v58.5,22.2 58.52,22.23 R1.1
  Bottom 0.305: v58.5,22.2 58.6,22.2 63.9,27.5 63.9,45.9 60.5,49.3 v59.6,49.3
N$2  (via drill 0.3)
  Top 0.305: R2.1 58.56,26.6 57.4,26.6 56.1,25.3 v56.1,23.7 U1.5 | v60.4,48.2 44.42,48.2 K1.27
  Bottom 0.305: v56.1,23.7 57.7,23.7 63.3,29.3 63.3,45.5 60.6,48.2 v60.4,48.2
N$3
  Top 0.305: U1.7 54.73,19.73 53.7,18.7 53.7,17.2 54.8,16.1 R3.1 55.8,16.05 55.8,14.7 57.17,13.33 58.93,13.33 TP3.TP
N$4
  Top 0.305: U$13.4 58.08,30.54 C39.2
N$5  (via drill 0.3)
  Top 0.2: U$8.12 57.23,38.12 57.5,38.39
  Top 0.254: 57.5,38.39 58.63,38.39 C53.2 | 58.65,39.64 C52.2 v60,40.8 | JMP1.2 45.1,43 46.3,41.8 v49.2,41.8
  Top 0.305: 58.63,38.39 58.63,39.62 C52.2
  Bottom 0.254: v49.2,41.8 55.1,41.8 56.9,40 59.2,40 v60,40.8
N$6
  Top 0.254: C106.1 C107.1 23,41.55 L100.1 22.15,43.85 IC2.6
N$7
  Top 0.406: POWER.C 51.26,22.7 R30.2
N$8
  Top 0.2: U$8.31 45.73,37.32 45.48,37.07
  Top 0.254: 45.48,37.07 44.1,35.69 43.25,35.69 R4.2
N$9
  Top 0.254: U$3.38 13.84,25.14 C6.2 11.89,24.64 U$4.2
N$10  (via drill 0.3)
  Top 0.254: v46.2,25.59 47.7,25.59 48.98,24.31 C22.2 | R4.1 40.87,35.66 v40.8,35.59
  Bottom 0.254: v46.2,25.59 45.5,25.59 43.6,27.49 43.6,32.79 v40.8,35.59
N$11
  Top 0.254: C23.2 52.6,25.71 C22.1 52.28,25.19 49,25.19 47,27.19 47,28.49 47.8,29.29 48.5,29.29 C25.1
N$12
  Top 0.2: U$8.6 52.53,32.73 52.84,32.42
  Top 0.254: 52.68,32.58 52.84,32.42 R22.2
N$13
  Top 0.254: U$3.37 13.84,25.64 C7.2 12.31,26.14 U$4.1
N$14
  Top 0.2: U$8.5 52.13,32.72 51.5,32.09
  Top 0.254: 51.5,32.09 51.5,31.38 R20.2
N$15
  Top 0.305: U$3.7 19.59,21.99 C8.1
N$16
  Top 0.254: TP4.P$1 16.59,29.99 U$3.30
N$17
  Top 0.254: U$3.1 16.59,20.49 16.09,19.99 R38.1
N$18
  Top 0.254: U$3.2 17.09,20.49 17.49,20.09 R39.1
N$19
  Top 0.2: U$8.27 47.67,38.92
  Top 0.254: 47.67,38.92 47.37,38.92 C48.2
N$20
  Top 0.254: R40.1 23.94,24.36 22.66,25.64 U$3.14
N$21
  Top 0.254: R41.1 25.19,24.41 23.46,26.14 U$3.15
N$23  (via drill 0.3)
  Top 0.254: v14.94,18.89 14.94,18.46 15.3,18.1 15.3,15.3 21.4,9.2 21.4,7.4 22,6.8 23.9,6.8 24.5,7.4 24.5,9.2 25.9,10.6 25.9,12.1 25.5,12.5 23.3,12.5 22.7,13.1 20.2,13.1 18.3,15 18.3,17.7 18.64,18.04 v18.64,18.89
  Top 0.305: R42.2 v18.64,18.89 | C13.1 v14.94,18.89
N$25
  Top 0.305: U$5.6 30.96,17.68 C14.1
N$26
  Top 0.2: U$8.32 46.43,36.92 46.08,36.57
  Top 0.254: 46.08,36.57 44,34.49 43.2,34.49 R10.2
N$27
  Top 0.305: U$5.1 38.91,16.39 C15.1 R43.2
  Top 0.406: U$9.1 29.2,21.19 29.2,15.8 32.3,12.7 37.5,12.7 39.04,14.24 C17.1 39.29,14.81 C15.1
  Top 0.61: U$7.1 U$9.1
N$28
  Top 0.254: C31.2 R10.1
N$29  (via drill 0.3)
  Top 0.254: C40.1 43.25,32.59 | 43.25,32.59 43.25,33.13 C31.1 | v44.6,32.49 43.35,32.49 43.25,32.59 | C38.2 51.04,26.63 v51.3,26.89
  Bottom 0.254: v44.6,32.49 44.6,27.59 45.9,26.29 50.7,26.29 v51.3,26.89
N$30  (via drill 0.3)
  Top 0.254: R20.1 51.53,28.63 50.9,28 50.27,28 C38.1 C2.1
  Top 0.305: R20.1 52.65,30.05 v52.7,30.1 | JP3.TIP 55.54,12.96 v54.4,14.1
  Bottom 0.254: v52.7,30.1 53.6,29.2 53.6,23.1 52.3,21.8 52.3,16.2 v54.4,14.1
N$31
  Top 0.2: U$8.3 51.33,33.92 51.18,33.77
  Top 0.254: 51.18,33.77 50.4,32.99 48.13,32.99 R15.2 45.3,31.38 R12.2 45.17,31.46 44.8,31.09 42.4,31.09 42,31.49 42,31.96 C40.2
N$32
  Top 0.2: U$8.4 51.73,33.43 50.3,32 R16.2
  Top 0.254: R18.2 49.07,31.42 C25.2 50.29,31.39 R16.2
N$33
  Top 0.2: U$8.29 43.19,38.12 R21.2
  Top 0.254: 43.18,38.07 R21.2
N$34
  Top 0.2: U$8.28 46.08,38.52 46.03,38.57
  Top 0.254: R19.2 45.53,40.35 C62.2 46.03,38.57
N$35
  Top 0.254: R24.2 44.25,41.58 R19.1 44.23,40.35 C62.1 42.18,39.07 41.9,38.79 41.9,38.13 R21.1 R23.1
N$36
  Top 0.2: U$8.11 56.97,37.72 57.12,37.57
  Top 0.254: 57.12,37.57 57.6,37.09 58.6,37.09 C49.2
N$37
  Top 0.2: U$8.8 53.33,34.76 53.68,34.41
  Top 0.254: 53.68,34.41 53.9,34.19 56,34.19 56.3,33.89 56.3,33.46 C56.2
N$38
  Top 0.2: U$8.7 52.93,34.06 53.18,33.81
  Top 0.254: 53.18,33.81 53.6,33.39 55.07,33.39 C56.1
N$39
  Top 0.305: U$5.2 39.02,17.04 C15.2 | R43.1 C15.2 | C15.2 39.29,18.41 R44.2
N$40
  Top 0.2: U$8.9 55.57,36.92 55.92,36.57
  Top 0.254: 55.92,36.57 56.7,35.79 56.7,34.79 57.6,33.89 C50.2 59.91,33.88 C51.1
N$41
  Top 0.2: U$8.2 50.93,34.22 50.68,33.97
  Top 0.254: 50.68,33.97 50.3,33.59 47.23,33.59 C57.2
N$42
  Top 0.254: U$6.1 C21.1
N$43
  Top 0.2: U$8.1 47.73,36.32 46.63,35.22
  Top 0.254: 46.63,35.22 45.8,34.39 C57.1
N$44
  Top 0.254: U$11.1 35.74,32.45 C24.1 R45.2 34.39,34.19 C26.1 33.53,34.53 U$6.5
  Top 0.61: U$11.1 U$10.1
N$45
  Top 0.254: C23.1 53.98,28.78 C58.2 54.04,28.84 R22.1
  Top 0.406: JP3.RING 48.64,16.94 50.4,18.7 52.6,18.7 54.2,20.3 54.2,25 55.6,26.4 55.6,28.1 54.9,28.8 C58.2
N$46
  Top 0.254: R46.2 C24.2 R45.1 34.8,35.8 U$6.6
N$50
  Top 0.2: U$8.30 44.93,37.72 44.78,37.57
  Top 0.254: 44.78,37.57 44,36.79 43.21,36.79 R23.2
N$51  (via drill 0.3)
  Top 0.305: R24.1 42.96,40.26 v42.9,40.2 | v55.5,4.6 55.5,2.14 JP3.SLEEVE
  Bottom 0.305: v42.9,40.2 42.9,39.4 39.9,36.4 39.9,35 42.8,32.1 42.8,24.1 55.5,11.4 v55.5,4.6
N$52
  Top 0.2: U$8.15 54.92,39.32 59.2,43.6 R5.2
N$53  (via drill 0.3)
  Top 0.254: R36.1 v25.6,49.3 | IC2.21 15.45,47.25 v16.1,46.6
  Bottom 0.254: v25.6,49.3 25.2,48.9 17.5,48.9 16.1,47.5 v16.1,46.6
N$54  (via drill 0.3)
  Top 0.254: IC2.22 14.95,47.35 v14.1,46.5 | R50.1 7.5,49.4 v7.9,49
  Bottom 0.254: v14.1,46.5 14.1,48.5 13.3,49.3 8.2,49.3 v7.9,49
N$55
  Top 0.2: U$8.16 54.42,39.72 57.9,43.2 R6.2
N$56
  Top 0.2: U$8.18 52.93,41.73 54.4,43.2 56.3,43.2 56.7,43.6 R7.2
N$57  (via drill 0.3)
  Top 0.254: IC2.24 12.72,48.38 v12.7,48.4 12.6,48.5 R11.1 | U$17.P$2 6,48.4 v6.3,48.1
  Bottom 0.254: v6.3,48.1 12.4,48.1 v12.7,48.4
N$58
  Top 0.2: U$8.19 52.53,41.93 54.2,43.6 55.4,43.6 55.5,43.7 R8.2
N$59
  Top 0.2: U$8.20 52.13,42.18 R17.2
N$60
  Top 0.2: U$8.21 51.73,42.43 53.1,43.8 R25.2
N$61
  Top 0.2: U$8.22 51.33,43.78 R26.2
N$62  (via drill 0.3)
  Top 0.254: U$3.20 22.64,28.64 24.4,30.4 24.4,32.8 22.9,34.3 v22.9,36.7 | R33.1 23.7,44.8 v24.4,45.5
  Bottom 0.254: v22.9,36.7 22.9,37 20.6,39.3 20.6,43 23.1,45.5 v24.4,45.5
N$63
  Top 0.254: U$3.28 17.59,33.26 R27.2
N$64
  Top 0.254: U$3.27 18.09,33.54 R28.2
N$65
  Top 0.254: U$3.26 18.59,32.19 19.5,33.1 R29.2
N$66
  Top 0.254: U$3.25 19.09,31.49 20.7,33.1 R31.2
N$67
  Top 0.254: IC2.27 8.65,45.85 TP8.TP
N$68
  Top 0.254: IC2.28 9.25,45.35 TP7.TP
N$69
  Top 0.254: IC2.29 10.65,44.85 TP10.TP
N$70
  Top 0.254: U$3.24 19.59,30.89 21.9,33.2 R32.2
N$71
  Top 0.406: C29.1 39.85,46.9 U$14.4
N$72
  Top 0.406: U$1.3 U$1.2 U$1.1 8.1,30.25 R37.2
N$73
  Top 0.406: R48.2 12.15,32.5 U$1.4 10.8,32.95 Q1.1
N$80
  Top 0.406: U$1.6 8.45,34.65 Q1.3 7.55,36.25 L1.2
PD_ALM
  Top 0.254: U$3.23 20.09,30.69 22.3,32.9 TP9.P$1
RPI_RXD
  Top 0.254: R36.2 28.05,49.95 27.4,50.6 27.4,52 26.9,52.5 19.8,52.5 K1.10
RPI_TXD
  Top 0.254: R50.2 5.55,49.65 6.9,51 6.9,52.1 7.3,52.5 14.72,52.5 K1.8
RX_ANA_SUP  (via drill 0.3)
  Top 0.254: U$3.39 14.84,24.64 14.64,24.44 v14.64,23.79 | U$3.33 14.66,27.64 13.94,28.36 v13.94,28.99 13.54,29.39 C11.1 | C18.1 13.29,18.39 v11.9,17 10.8,15.9 10.8,14.4 11.06,14.14 D3.3 | D2.3 21.69,19.71 v21.2,20.2
  Top 0.305: v32.64,23.99 35.47,23.99 U$7.2
  Bottom 0.254: 14.74,31.69 14.69,31.69 14,31 14,29.05 v13.94,28.99 14.64,28.29 v14.64,23.79 14.64,20.4 | 14.64,20.4 14.64,19.74 v11.9,17 | v21.2,20.2 14.84,20.2 14.64,20.4
  Bottom 0.305: 14.74,31.69 28.64,31.69 32.64,27.69 v32.64,23.99
RX_DIG_SUP  (via drill 0.3)
  Top 0.2: R47.1 C12.1
  Top 0.305: U$9.2 29.22,24.04 C19.1 v26.34,25.49 | U$3.31 15.81,29.52 v14.94,30.39 14.74,30.59 C12.1
  Bottom 0.305: v14.94,30.39 25.54,30.39 26.34,29.59 v26.34,25.49
SAM_RESETN  (via drill 0.3)
  Top 0.254: IC2.40 15.45,36.25 v15.5,36.2 | v32.8,40.9 32.75,40.95 R9.2 30.82,40.98 CON_JTAG1.10 32.06,43.06 32.4,43.4 32.4,46.4 U$18.P$1
  Bottom 0.254: v15.5,36.2 16.2,35.5 27.4,35.5 v32.8,40.9
SAM_SWDCLK
  Top 0.2: IC2.45 17.95,39.15 18.6,38.5 28,38.5 29.4,39.9 29.4,46.5 29.7,46.8 30.75,46.8 CON_JTAG1.4
SAM_SWDIO
  Top 0.2: IC2.46 18.45,39.25 18.8,38.9 27.8,38.9 28.9,40 28.9,47.5 29.5,48.1 30.79,48.1 CON_JTAG1.2
SCL  (via drill 0.3)
  Top 0.254: IC2.32 13.55,43.35 v13.8,43.1 | v8,27.1 8,25.5 6.8,24.3 | 6.8,24.3 TP1.TP | R35.2 6.8,24.3
  Bottom 0.254: v13.8,43.1 14.3,42.6 14.3,40.4 11.9,38 11.9,32.3 8,28.4 v8,27.1
SDA  (via drill 0.3)
  Top 0.254: IC2.31 14.65,43.85 15,43.5 v15,42.9 | v8.9,28 8.9,24.7 TP2.TP 8.3,22.05 R34.2
  Bottom 0.254: v15,42.9 15,40.3 12.4,37.7 12.4,31.9 8.9,28.4 v8.9,28
SPO2_CS  (via drill 0.3)
  Top 0.2: R28.1 v18.3,36.7 | IC2.7 19.05,44.35 v18.6,43.9
  Bottom 0.2: v18.6,43.9 18.6,37 v18.3,36.7
SPO2_DRDY  (via drill 0.3)
  Top 0.2: R27.1 v17.1,36.7 | IC2.3 19.85,42.35 18.6,41.1 v17.9,41.1
  Bottom 0.2: v17.9,41.1 17.9,37.5 v17.1,36.7
SPO2_MISO  (via drill 0.3)
  Top 0.2: R31.1 v20.7,36.7 | IC2.9 19.85,45.35 v19.7,45.2
  Bottom 0.2: v19.7,45.2 19.7,37.7 v20.7,36.7
SPO2_MOSI  (via drill 0.3)
  Top 0.2: R29.1 v19.5,36.7 | IC2.11 20.45,46.35 20,45.9 19,45.9 18.6,45.5 v18.6,45
  Bottom 0.2: v19.5,36.7 19.3,36.9 19.3,44.3 v18.6,45
SPO2_SCK  (via drill 0.3)
  Top 0.2: R32.1 v21.9,36.7
  Top 0.254: IC2.12 22.55,46.85 v22.9,46.5
  Bottom 0.2: v21.9,36.7 20.1,38.5 20.1,43.7 v22.9,46.5
SPO2_START
  Top 0.254: IC2.8 22.1,44.85 R33.2
TARGET_USB_N
  Top 0.254: IC2.33 8.3,42.85 R14.1
TARGET_USB_P
  Top 0.254: IC2.34 10.35,42.35 9.4,41.4 R13.1
TX_CTRL_SUP  (via drill 0.3)
  Top 0.254: C27.1 25.09,29.34 v25.04,29.29
  Top 0.305: U$3.11 22.44,23.57 v22.44,22.79 C9.1
  Top 0.406: C27.1 29.03,29.34 U$10.2
  Bottom 0.305: v25.04,29.29 25.04,25.39 v22.44,22.79
TXN
  Top 0.254: R40.2 23.94,16.44 D1.1 23.74,15.86 27.2,12.4 27.2,11.24 X1.3
TXP
  Top 0.254: R41.2 25.19,16.49 D5.1 25.44,14.96 27.1,13.3 27.91,13.3 X1.2
USB_N
  Top 0.254: JP5.2 R14.2
USB_P
  Top 0.254: JP5.3 5.65,42.05 6.3,41.4 R13.2
VCC
  Top 0.406: C5.1 38.5,44.95 U$14.5 41.55,43.3 JMP1.1
VCCIO  (via drill 0.3)
  Top 0.406: L1.1 9.9,38.7 v9.4,39.2 | JP5.1 5.85,43.35 v6.5,44 C3.1
  Bottom 0.406: v9.4,39.2 9.4,41.1 v6.5,44
VCM
  Top 0.2: U$3.4 18.09,21.99 R42.1
VDDCORE
  Top 0.254: IC2.43 16.95,38.55 17.9,37.6 23.65,37.6 C102.1

## Text on the board
tPlace: RST | SW1 | HealthyPi | JTAG | SpO2 Probe | IN- | BP IN | UART2 | ECG IN
bPlace: pc_rpi_healthypi_v2